# Altium PCB B214.PcbDoc
Units mm, origin at the board's own origin, x right, y up, seen from the top; angles counter-clockwise.
Board outline 40 x 22 mm, 4 copper layers (Top, Layer 1, Layer 2, Bottom), stack 1.564 mm thick; 17 components, 22 nets, 97 pads, 260 vias.
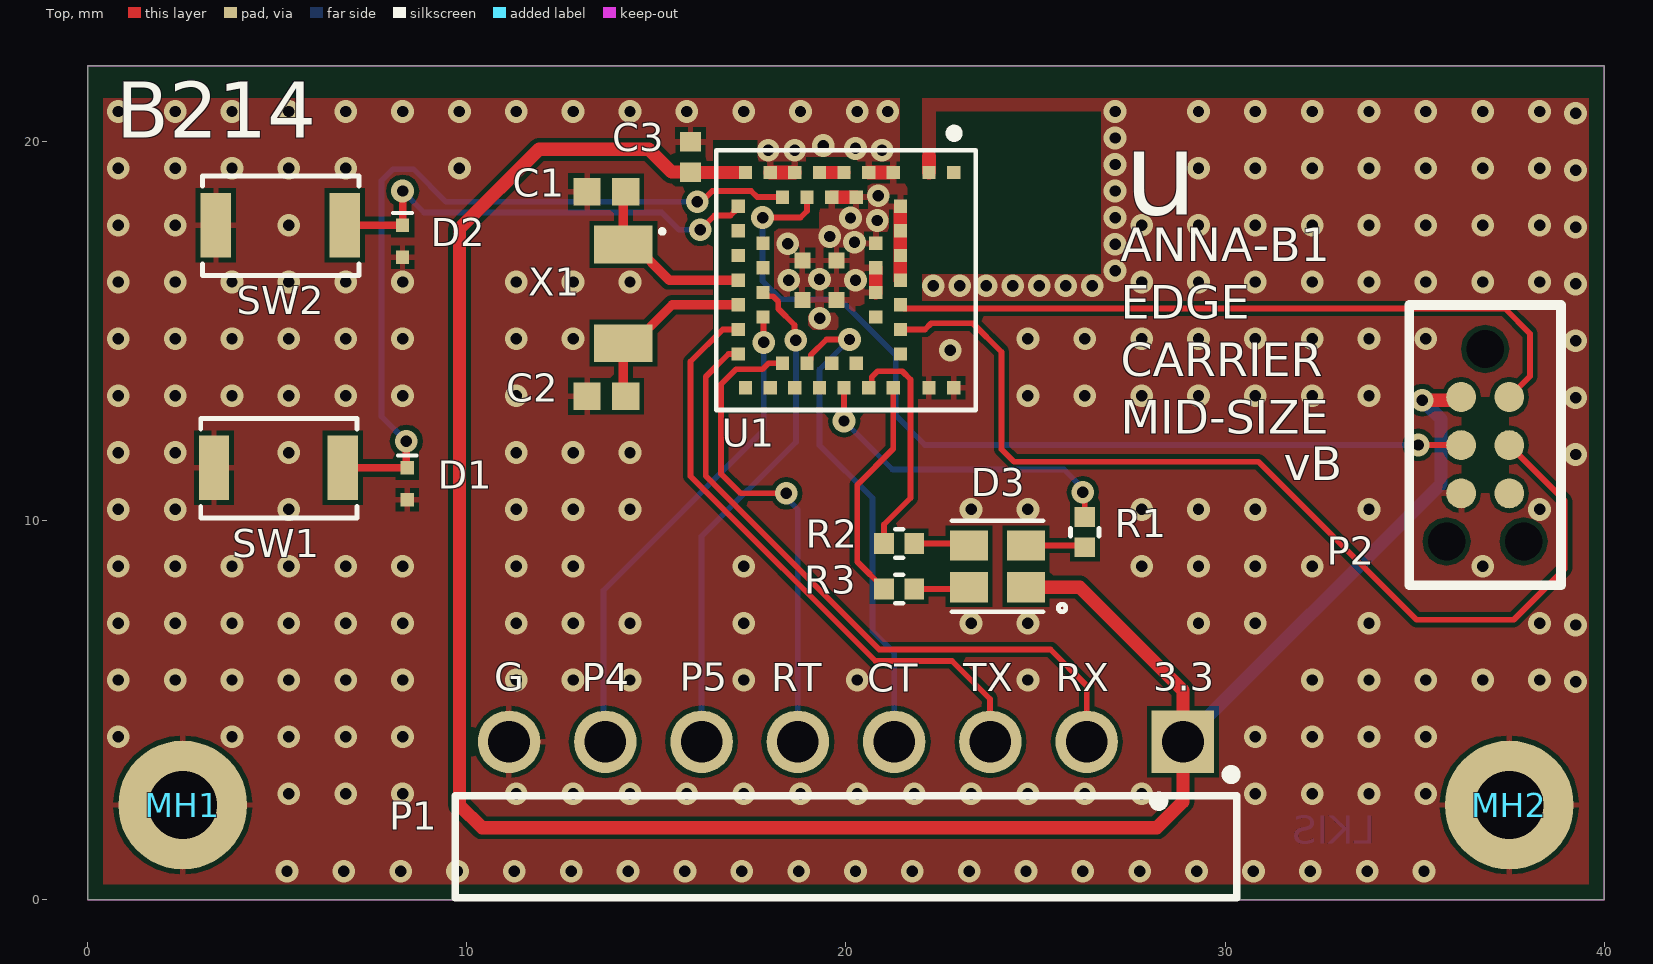
[diagram p0: Top view]
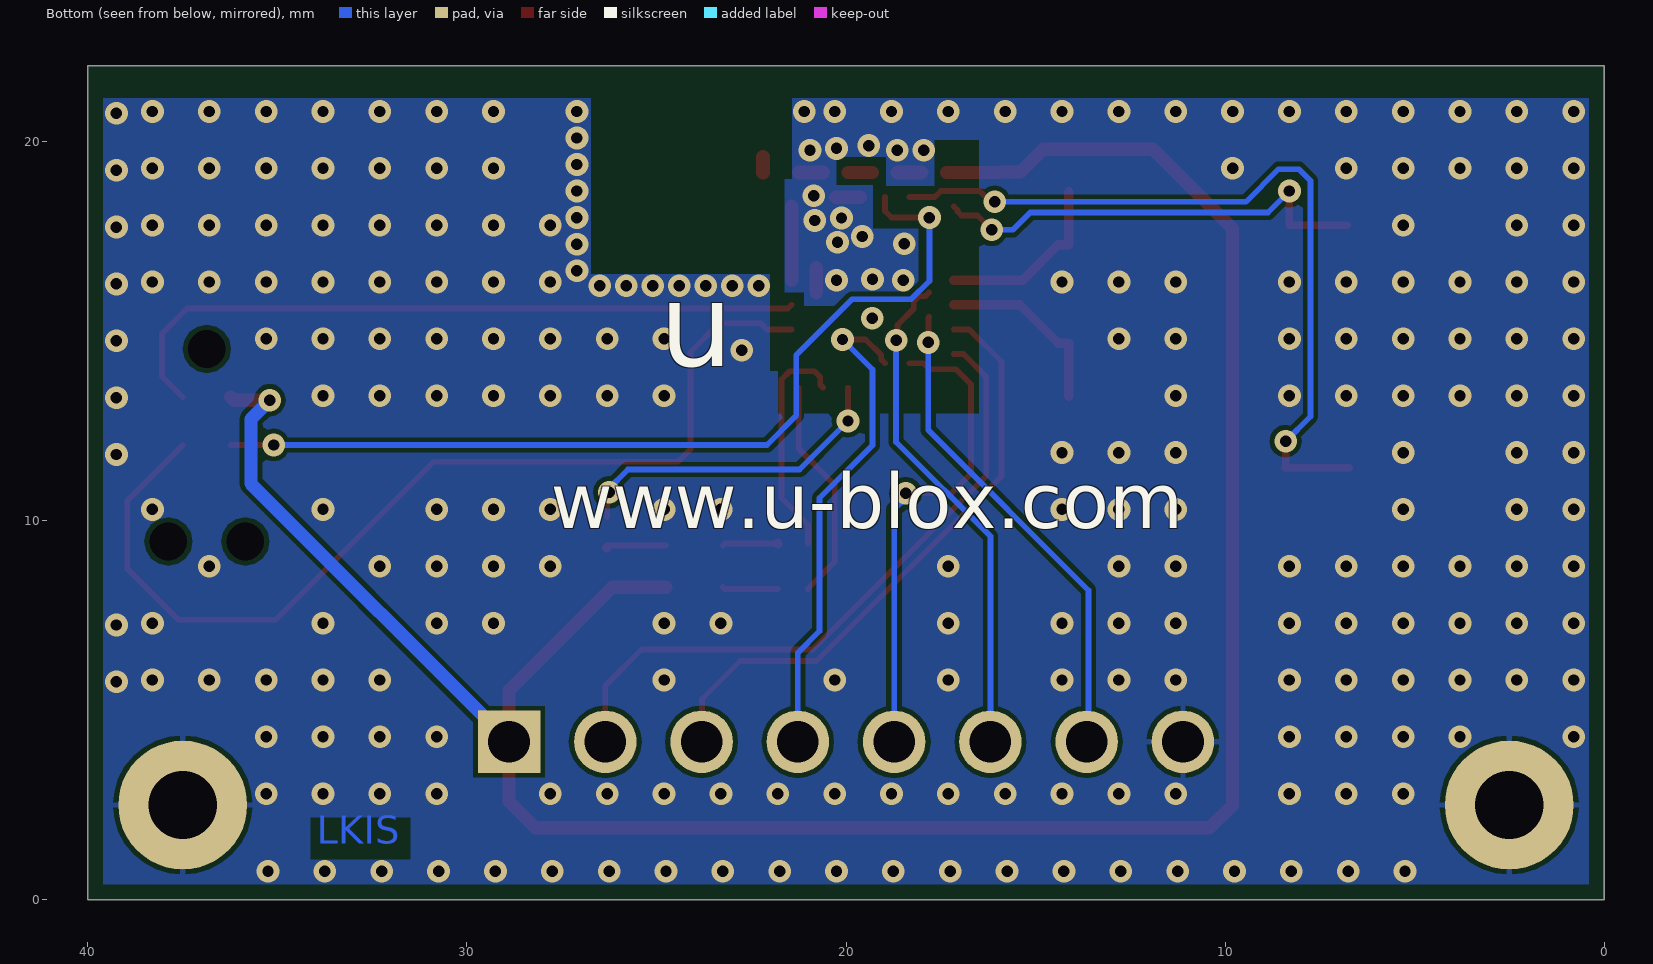
[diagram p1: Bottom view, seen from below]
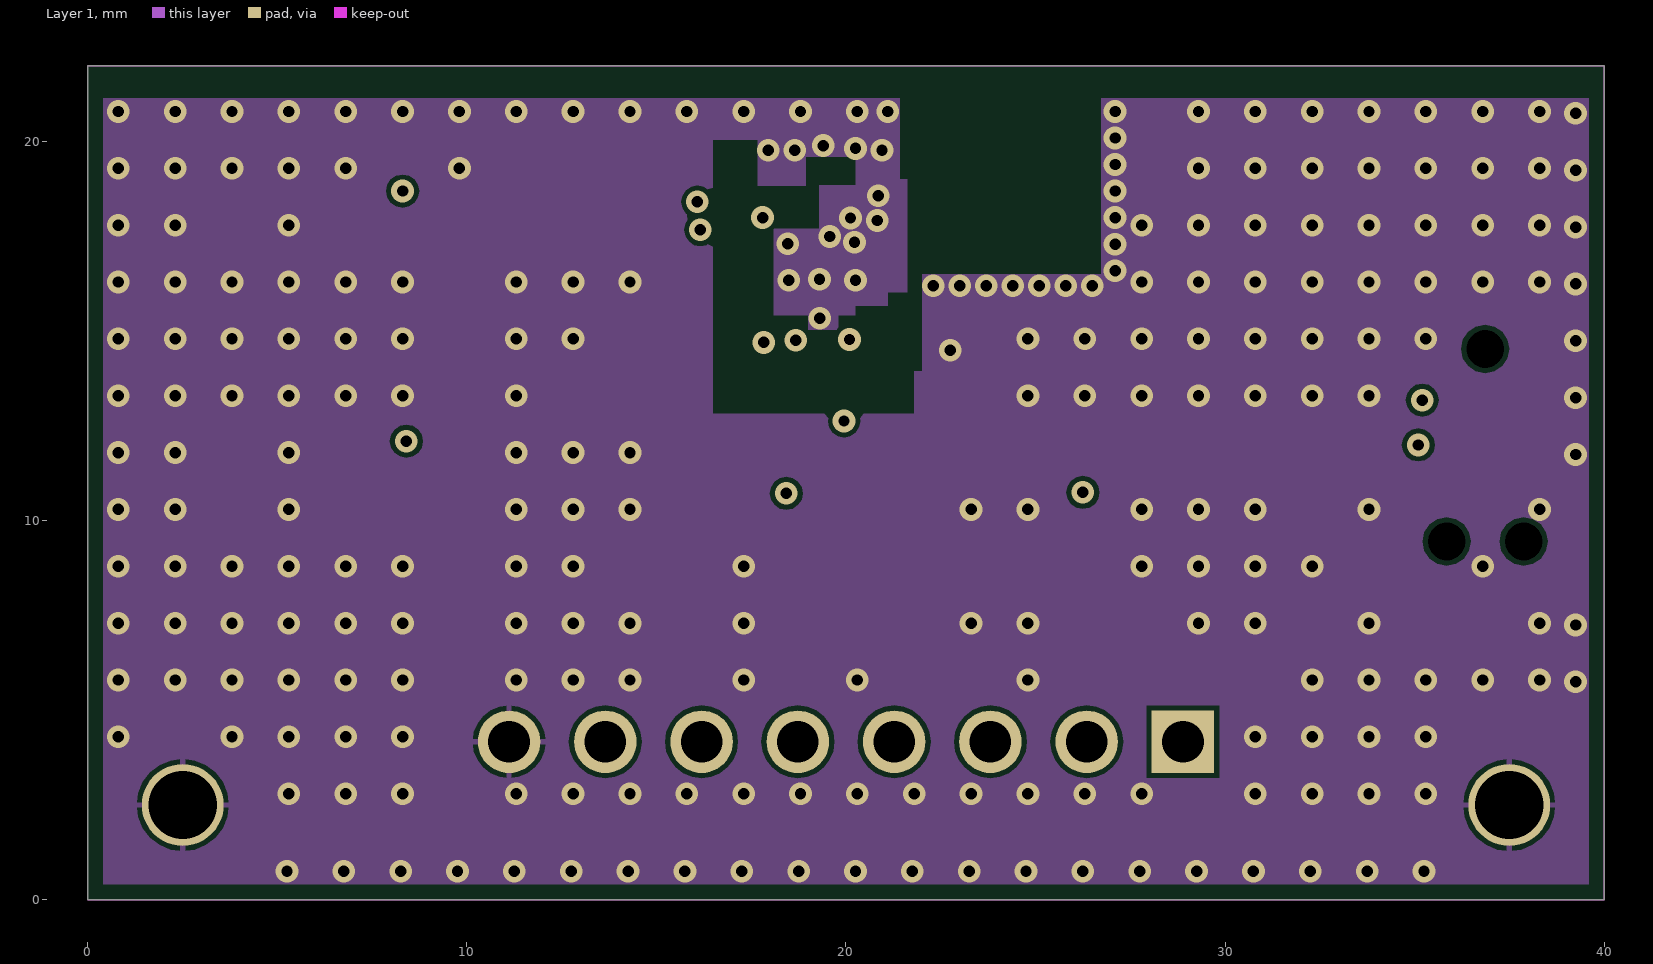
[diagram p2: Layer 1]
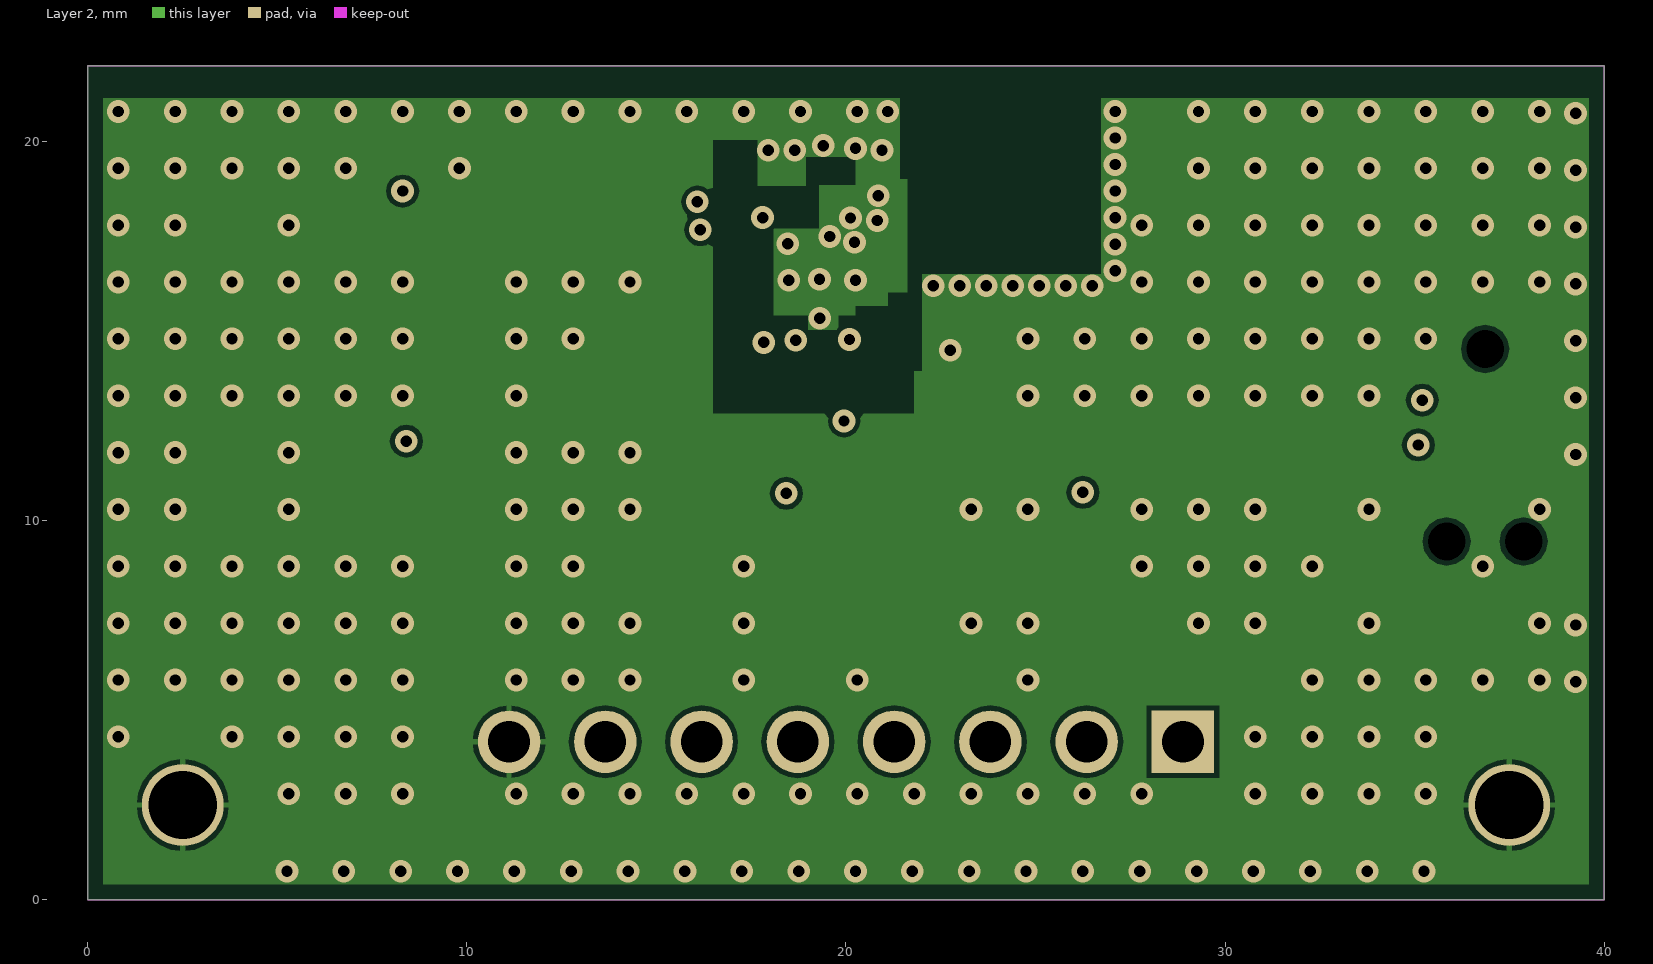
[diagram p3: Layer 2]

## Layer stack, top to bottom
Top Solder: solder mask 0.0203, Solder Resist, Dk 3.5
Top: signal copper 0.0406
Dielectric 1: prepreg 0.0711, PP-006, Dk 4.1
Layer 1: signal copper 0.035
Core: core 1.27, Core-043, Dk 4.3
Layer 2: signal copper 0.035
Dielectric 2: prepreg 0.0711, PP-006, Dk 4.1
Bottom: signal copper 0.0406
Bottom Solder: solder mask 0.0203, Solder Resist, Dk 3.5

## Board outline
0,22 40,22 40,0 0,0

## Design rules (kind name [scope] priority, off if disabled: settings)
BoardOutlineClearance [All] p1: gap=0.4 ignorepadtopadclearanceinfootprint=FALSE
Clearance "Stitching GND" [IsStitchingVia and InNet('GND') vs (IsVia and (Not IsStitchingVia)) Or IsPad] p1: gap=0.127 ignorepadtopadclearanceinfootprint=TRUE
Clearance Clearance_Poly [InPolygon vs OnLayer('Keep-Out Layer') OR (OnLayer('Multi-Layer') AND IsPad  AND Not(PadIsPlated))] p2: gap=0.127 ignorepadtopadclearanceinfootprint=TRUE
Clearance [All] p3: gap=0.127 ignorepadtopadclearanceinfootprint=FALSE except(0: Arc-Text Arc-Hole Track-Text Track-Hole SMDPad-Text SMDPad-Hole THPad-Text THPad-Hole Via-Text Via-Hole Fill-Text Fill-Hole Poly-Text Poly-Hole Region-Text Region-Hole Text-Text Text-Hole)
ComponentClearance [All] p1: gap=0.127 collisioncheckmode=3 verticalgap=0.254 showdistances=FALSE
DiffPairsRouting .14 [All] p1: maxlimit=0.254 minlimit=0.1 mostfreqgap=0.254 toplayer_maxgap=0.1 toplayer_prefgap=0.1 toplayer_minwidth=0.1 toplayer_maxwidth=0.1 toplayer_prefwidth=0.1 midlayer1_mingap=0.254 midlayer1_minwidth=0.381 midlayer1_maxwidth=0.381 midlayer1_prefwidth=0.381 midlayer2_mingap=0.254 midlayer2_minwidth=0.381 midlayer2_maxwidth=0.381 midlayer2_prefwidth=0.381 bottomlayer_maxgap=0.1 bottomlayer_prefgap=0.1 bottomlayer_minwidth=0.1 bottomlayer_maxwidth=0.1 bottomlayer_prefwidth=0.1 maxuncoupledlength=12.7
Height [All] p1: minheight=0 maxheight=25.4 prefheight=2.54
HoleSize [All] p1: absolutevalues=TRUE maxlimit=2540 minlimit=0.127 maxpercent=80.000 minpercent=20.000
HoleToHoleClearance [All] p1: gap=0.152 allowstackedmicrovias=TRUE
MinimumSolderMaskSliver [All] p1: minsoldermaskwidth=0.025
PlaneClearance [InPoly] p1: clearance=0.254
PlaneConnect [All] p1: pad.planeconnectstyle=Relief pad.reliefexpansion=0.508 pad.reliefentries=4 pad.reliefconductorwidth=0.254 pad.reliefairgap=0.254 via.planeconnectstyle=Direct via.reliefexpansion=0.508 via.reliefentries=4 via.reliefconductorwidth=0.254 via.reliefairgap=0.254
PolygonConnect ThermalVias [IsVia] p1: connectstyle=Direct reliefconductorwidth=0.254 reliefentries=4 polygonreliefangle="90 Angle" airgapwidth=0.254
PolygonConnect "PolygonConnect - Power" [InNetClass('')] p2: connectstyle=Relief reliefconductorwidth=0.254 reliefentries=4 polygonreliefangle="90 Angle" airgapwidth=0.127
PolygonConnect PolygonConnect-BGA [InComponentClass('')] p3: connectstyle=Relief reliefconductorwidth=0.152 reliefentries=4 polygonreliefangle="45 Angle" airgapwidth=0.152
PolygonConnect PolygonConnect-General [All] p4: connectstyle=Relief reliefconductorwidth=0.152 reliefentries=4 polygonreliefangle="90 Angle" airgapwidth=0.127
RoutingLayers [All] p1: top layer_v5=TRUE mid layer 1_v5=FALSE mid layer 2_v5=TRUE bottom layer_v5=TRUE
RoutingVias [All] p1: holewidth=0.3 width=0.6 viastyle="Through Hole" minholewidth=0.2 minwidth=0.5 maxholewidth=7 maxwidth=1
SMDEntry [All] p1 off: side=TRUE corner=TRUE anyangle=TRUE
SilkToBoardRegionClearance [All] p1 off:
SilkToSilkClearance [All] p1 off: silktosilkclearance=0.025
SilkToSolderMaskClearance [IsPad] p1 off: minsilkscreentomaskgap=0 clearancetoexposedcopper=TRUE
SolderMaskExpansion SolderMaskExpansion_via [IsVia] p1: expansion=-0.254 istentingtop=TRUE
SolderMaskExpansion [All] p2: expansion=0.05 istentingtop=FALSE
UnRoutedNet [All] p1: checkbadconnections=TRUE
ViasUnderSMD [All] p1: allowed=FALSE
Width [All] p1: maxlimit=2.54 minlimit=0.127 preferedwidth=0.152 toplayer_maxwidth=1 toplayer_prefwidth=0.152 bottomlayer_maxwidth=1 bottomlayer_prefwidth=0.152 minimp=50.000000 maximp=50.000000 favimp=50.000000
Width Width_1 [All] p2: maxlimit=0.254 minlimit=0.254 preferedwidth=0.254
17 further rules are at their usual default settings.

## Components (designator, comment, footprint, x,y, rotation, side; value= is the part's Value field where it differs from the comment)
C1 "Capacitor 10 pF +/- 5% 50 V 0402" CAPC1005X55X25ML05T05 13.675,18.685 r180 top value=10pF
C2 "Capacitor 10 pF +/- 5% 50 V 0402" CAPC1005X55X25ML05T05 13.675,13.285 r180 top value=10pF
C3 "UBXH01-00002434U7" "Cap 0402 HD" 15.9,19.6 r90 top value=4U7
D1 "110-00019" SOD-923 8.425,10.975 r270 top
D2 "110-00019" SOD-923 8.3,17.375 r270 top
D3 "115-00011" 4-PLCC 24,8.8 r0 top
MH1 "MH_M1.5DNP" MH_M1.5 2.5,2.5 r0 top
MH2 "MH_M1.5DNP" MH_M1.5 37.5,2.5 r0 top
P1 "61300811021" 61300811021 20,1.4 r0 top
P2 "TC2030-IDC-NLDNP" TC2030-IDC-NL 36.865,14.535 r270 top
R1 "180-00031499R" "RES 0402 HD" 26.3,9.7 r270 top value=499R
R2 "180-00098220R" "RES 0402 HD" 21.4,9.4 r0 top value=220R
R3 "180-00098220R" "RES 0402 HD" 21.4,8.2 r0 top value=220R
SW1 "135-00007" B3U-1000P 5.025,11.4 r180 top
SW2 "135-00007" B3U-1000P 5.075,17.8 r180 top
U1 "ANNA-B112-OPENCPU" ANNA_LGA52S_650X650 20,16.35 r270 top
X1 "100-00005" XTAL_3215 14.125,15.985 r270 top

## Footprints (in the part's own frame and the unit in brackets; to place one, negate y for a bottom-side part, rotate by r counter-clockwise, add the part's x,y. Pads: shape width x height; smd on the part's side, far side on the other; paste and mask are expansions set on the pad)
4-PLCC [mm] "4 Pin Plastic Leaded Chip Carrier, 2mm x 2mm"
  rect 1x0.8 smd: 1(0.75,-0.55) 2(-0.75,-0.55) 3(-0.75,0.55) 4(0.75,0.55)
  silkscreen extent -1.2,-1.2 1.8,1.2, body extent -1.05,-1.05 1.05,1.05, height 1.01
61300811021 [mm]
  rect 1.65x1.65 hole 1.1: 1(8.89,2.77)
  round 1.65 hole 1.1: 2(6.35,2.77) 3(3.81,2.77) 4(1.27,2.77) 5(-1.27,2.77) 6(-3.81,2.77) 7(-6.35,2.77) 8(-8.89,2.77)
  silkscreen extent -10.31,-1.35 10.31,2.03, body extent -10.16,-7.27 10.16,3.09, height 2.58
ANNA_LGA52S_650X650 [mm]
  rect 0.35x0.35 smd paste+0 mask+0.05: 1(-2.84,2.84) 2(-2.84,2.19) 3(-2.84,1.248) 4(-2.84,0.598) 5(-2.84,-0.052) 6(-2.84,-0.702) 7(-2.84,-1.352) 8(-2.84,-2.002) 9(-2.84,-2.652) 10(-2.19,0.273) 11(-2.19,-0.377) 12(-2.19,-1.027) 13(-2.19,-1.677) 14(-1.95,-2.84) 15(-1.3,-2.84) 17(0,-2.84) 18(0.65,-2.84) 20(1.95,-2.84) 21(-0.975,-2.19) 23(0.325,-2.19) 24(0.975,-2.19) 25(2.84,-2.652) 26(2.84,-2.002) 27(2.84,-1.352) 28(2.84,-0.702) 29(2.84,-0.052) 30(2.84,0.598) 31(2.84,1.248) 32(2.84,2.19) 33(2.84,2.84) 34(2.19,-1.677) 35(2.19,-1.027) 36(2.19,-0.377) 37(2.19,0.273) 38(1.95,1.435) 39(1.3,1.435) 40(0.65,1.435) 41(0,1.435) 42(-0.65,1.435) 43(-1.3,1.435) 44(-1.95,1.435) 46(0.325,0.785) 48(-0.975,0.785)
  rect 0.35x0.35 smd mask+0.05: 16(-0.65,-2.84) 19(1.3,-2.84) 22(-0.325,-2.19) 45(0.975,0.785) 47(-0.325,0.785)
  rect 0.42x0.42 smd paste+0 mask+0.05: 49(-0.52,-0.252) 50(-0.52,-1.152) 51(0.52,-1.152) 52(0.52,-0.252)
  silkscreen extent -3.97,-3.42 3.42,3.43, body extent -3.25,-3.25 3.25,3.25, height 1.2
B3U-1000P [mm] "Button Tactile, SMT 4mm x 2.5mm, height 1.2mm"
  rect 0.8x1.7 smd: 1(-1.7,0) 2(1.7,0)
  silkscreen extent -2.07,-1.3 2.05,1.33, body extent -2,-1.25 2,1.25, height 1.6
"Cap 0402 HD" [mm] "Chip Capacitor, 2-Leads, Body 1.00x0.50mm, IPC High Density"
  rect 0.52x0.55 smd: 1(-0.4,0) 2(0.4,0)
  body extent -0.55,-0.3 0.55,0.3, height 0.6
CAPC1005X55X25ML05T05 [mm] "Chip Capacitor, 2-Leads, Body 1.05x0.55mm, IPC Low Density"
  rect 0.72x0.72 smd: 1(-0.51,0) 2(0.51,0)
  body extent -0.53,-0.28 0.53,0.28, height 0.55
MH_M1.5 [mm] "Mounting Hole M1.5 Metric, 3.4mm diameter pad"
  round 3.4 / inner round 2.159 / far side round 3.4 hole 1.8: 1(0,0)
"RES 0402 HD" [mm] "Chip Resistor, 2-Leads, Body 1.05x0.54mm, IPC High Density"
  rect 0.52x0.55 smd: 1(-0.4,0) 2(0.4,0)
  silkscreen extent -0.1,-0.38 0.1,0.38, body extent -0.55,-0.3 0.55,0.3, height 0.4
SOD-923 [mm] "SOD-923, 2-Leads, Body 1.25x2.50mm, IPC High Density,"
  rect 0.36x0.35 smd mask+0.05: 1(-0.42,0) 2(0.42,0)
  silkscreen extent -0.75,-0.25 -0.75,0.25, body extent -0.4,-0.3 0.4,0.3, height 0.4
TC2030-IDC-NL [mm] "Tag-Connect 6-Pin No Legs"
  round 0.9 hole 0.995 unplated: 0(0,0) 0(5.08,-1.016) 0(5.08,1.016)
  round 0.79 smd paste-0.39: 1(1.27,-0.635) 2(1.27,0.635) 3(2.54,-0.635) 4(2.54,0.635) 5(3.81,-0.635) 6(3.81,0.635)
  silkscreen extent -1.16,-2 6.24,2
XTAL_3215 [mm] "XTAL, 2-Leads, Body 1.50x3.20mm"
  rect 1x1.55 smd: 1(-1.3,0) 2(1.3,0)
  silkscreen extent -1.7,0.98 -1.6,1.07, body extent -1.65,-0.8 1.65,0.8, height 0.9

## Part data
C1 C2: library part CMP-001-00013-4, "Chip Capacitor, 10 pF, +/- 5%, 50 V, 0402 (1005 Metric)", Capacitor Type=Ceramic, Case/Package=0402, Max Operating Temperature=125°C, Min Operating Temperature=-55°C, Tolerance=5%, Voltage Rating=50V, Mounting Technology=SM, Pins=2, RoHS Compliant=True
C3: library part UBXH01-0000243, "CAP CER X5R 0402", Manufacturer="Murata Manufacturing Company, Ltd.", Manufacturer 2=None, Manufacturer P/N=GRM155R61A475MEAA, Max Operating Temp=85°C, Max Voltage=10.0V, Min Operating Temp=-40°C, Tolerance=20%, Automotive=None, Critical=None, Editor=dario.antonaz, Env=ROHS, Manufacturer 3=None, Manufacturer P/N 2=None, Manufacturer P/N 3=None, Max Current=None, Max Power=None, Mfg P/N Datasheet=https://wiki.u-blox.com/bin/view/Generic/Docs/DocumentSummary?index=24302, Mfg P/N Datasheet 2=None, Mfg P/N Datasheet 3=None, Mfg P/N Released=Yes, Mfg P/N Released 2=None, Mfg P/N Released 3=None, Mfg P/N Split=100, Mfg P/N Split 2=None, Mfg P/N Split 3=None, Mfg P/N Status=Active, Mfg P/N Status 2=None, Mfg P/N Status 3=None, Part Number=UBXH01-0000243, Part Type=Capacitor, Perferred=PREF, Permitted Use="Volume Products", RefDes=C, Release Data="2016-03-17 10:02:21.014314", Released by=pasquale.scorca, Single Source=None, Size=0x0y, UBX Wiki=https://wiki.u-blox.com/bin/view/Operations/PartDetails?index=24303
D1 D2: "Diode, ESD9B, 3.3V, ST5G, SOD-923", Manufacturer="ON Semiconductor", Manufacturer P/N=ESD9B3.3ST5G, MFG Package=SOD-923, Package Type=SOD, Part Name="Diode TVS 3.3V SOD-923", Voltage=3.3V, Arena Link=https://app.bom.com/a/4M5DJQ9Q9SR7DV4H?v=spec.summary, Body Size="0.8mm x 0.6mm", Component Mounting Type=SMT, Diode Type=TVS, Height=0.4mm, Item_Phase=Production, Part Number=110-00019, Part_Type=Diode, Pins=2, Revision=0A, Supplier 1=Arrow, Supplier Part Number 1=ESD9B3.3ST5G, Use in new designs=Yes
D3: "LED, RGB Diffused SMT, PLCC4 4 Pin", Color=RGB, Current="20mA Red, 10mA Green, 10mA, Blue", Manufacturer="Cree, Inc.", Manufacturer P/N=CLMVB-FKA-CFHEHLCBB7a363, MFG Package=PLCC4, Package Type=Custom, Part Name="LED RGB SMT 2mm x 2mm", Supplier Part Number 1=941-CLMVBFKACFHEHLCB, Voltage=5V, Arena Link=https://app.bom.com/a/UCV39GZGZIHY581D?v=spec.summary, Body Size="2.0mm x 2.0mm", Component Mounting Type=SMT, Height=1mm, Item_Phase=Production, Mounting Type=Vertical, Number of Circuits=3, Part Number=115-00011, Part_Type=LED, Pins=4, Revision=0A, Supplier 1=Mouser, Use in new designs=Yes, Vf="2V Red, 3V Green, 3V Blue"
MH1 MH2: library part MH_M1.5, "1.5M screw mounting hole, plated", Added By="Jeremy D", Added Date=2015-07-09, DNP=DNP, Height=0mm, Part Number=MH_M1.5, Size="3.4mm x 3.4mm", Type="Mounting Hole"
P1: library part CMP-1502-01075-1, "THT Angled Pin Header WR-PHD, Pitch 2.54 mm, Single Row, 8 pins", Contact Resistance=20mOhm, Manufacturer="Wurth Elektronik", Operating Temperature=-40to105degC, Rated Current=3A, Withstanding Voltage=500VAC, Working Voltage=250VAC, Datasheet URL=https://katalog.we-online.de/em/datasheet/6130xx11021.pdf, Gender=Male, Manufacturer Part Number=61300811021, Manufacturer URL=http://www.we-online.de, Mounting Technology=THT, Orientation=Angled, Package Reference=61300811021, Packaging=Bag, Part Number=61300811021, Pin Number=8, Pitch=2.54mm, Publisher=WurthElektronik, Row Number=Single
P2: library part TC2030-IDC-NL, "CON PADS FOR CBL PLUG-OF-NAILS 6-PIN NO LEGS", Manufacturer="TAG Connect", Added By="Paul B", Added Date=2015-04-22, DNP=DNP, Height=0, Manufacturer P/N=TC2030-IDC-NL, Part Number=TC2030-IDC-NL, Size="6.731mm x 12.446mm"
R1: library part 180-00031, "Resistor, 499ohm, 1%, 1/16W, 0402", Manufacturer="Rohm Semiconductor", Manufacturer 2="Samsung Electro-Mechanics America, Inc", Manufacturer P/N=MCR01MRTF4990, Manufacturer P/N 2=RC1005F4990CS, Part Name="RES SMD 499 OHM 1% 1/16W 0402", Power=1/16W, Supplier Part Number 1=RHM499CDCT-ND, Tolerance="+/- 1%", Alternate Footprint Ref="RES 0402", Arena Link=https://app.bom.com/a/Q8RZ5CVCVEDU1SS5?v=spec.summary, Component Mounting Type=SMT, Height=0.4mm, Item_Phase=Production, Part Number=180-00031, Part_Type=Resistor, Pins=2, Revision=0D, Size=0402, Supplier 1=Digi-Key, Supplier 2=Digi-Key, Supplier Part Number 2=1276-3992-1-ND, Use in new designs=Yes
R2 R3: library part 180-00098, "Resistor, 220ohm, 5%, 1/16W, 0402.", Manufacturer="Panasonic Electronic Components", Manufacturer 2="Samsung Electro-Mechanics America, Inc", Manufacturer P/N=ERJ-2GEJ221X, Manufacturer P/N 2=RC1005J221CS, Part Name="RES SMD 220 OHM 5% 1/16W 0402", Power=1/16W, Supplier Part Number 1=P220JCT-ND, Tolerance="+/- 5%", Alternate Footprint Ref="RES 0402", Arena Link=https://app.bom.com/a/8Q9HNUDUDWVBJC30?v=spec.summary, Component Mounting Type=SMT, Height=0.4mm, Item_Phase=Production, Part Number=180-00098, Part_Type=Resistor, Pins=2, Revision=0C, Size=0402, Supplier 1=Digi-Key, Supplier 2=Digi-Key, Supplier Part Number 2=1276-4360-1-ND, Use in new designs=Yes
SW1 SW2: "Button, Momentary SPST-NO, 0.05A, 12V, 3mm x 2.5mm", Current=50mA, Manufacturer="Omron Electronics Inc-EMC Div", Manufacturer P/N=B3U-1000P, Part Name="SWITCH TACTILE SPST-NO 0.05A 12V", Supplier Part Number 1=SW1020CT-ND, Voltage=12VDC, Arena Link=https://app.bom.com/a/TBU28FYFYHGV5FQ0?v=spec.summary, Body Size="3mm x 2.5mm", Component Mounting Type=SMT, Height=1.2mm, Item_Phase=Production, Part Number=135-00007, Part_Type=Button, Pins=2, Revision=0A, Supplier 1=Digi-Key, Switch/Button Circuit=SPST, Switch/Button Function=Off-Mom, Use in new designs=Yes
U1: "u-blox ANNA-B112 Bluetooth 5 LE module", Manufacturer=u-blox, Part Description="Stand-alone Bluetooth low energy module"
X1: "XTAL, 2Pin, 32.768kHz, 7pF 20ppm", Frequency=32.768kHz, Frequency Tolerance=20ppm, Manufacturer=Epson, Manufacturer 2="AVX Corporation", Manufacturer P/N="FC-135 32.7680KA-AG3", Manufacturer P/N 2=ST3215SB32768C0HPWBB, MFG Package=2-SMD, Part Name="XTAL 32.768kHz 7pF 20ppm 3215", Supplier Part Number 1=SER4086CT-ND, Arena Link=https://app.bom.com/a/L3MU07Q7Q98O5PC8?v=spec.summary, Body Size="3.2mm x 1.5mm", CL=7pF, Component Mounting Type=SMT, Height=0.9mm, Item_Phase=Production, Part Number=100-00005, Part_Type=Crystal/Oscillator, Pins=2, Revision=0C, Supplier 1=Digi-Key, Supplier 2=Digi-Key, Supplier Part Number 2=1253-1113-1-ND, Use in new designs=Yes

## Via types
v1: diameter 0.6, hole 0.3, Top to Bottom, tented both sides, 260 vias

## Nets (pads, with @x,y where several pads share a name; then routed paths per layer and width w, separated by ;. In a path a pad name is that pad's centre, name@x,y a point inside that pad or via, vN(x,y) a via of type N, cw(c..) or ccw(c..) an arc to the next point about the centre after c; other vN are vias at no path point)
3V3: C3.1 D3.1 P1.1 P2.1 U1.9 | length 64.8
  Top w0.35: U1.9 15.91,19.19 C3.1 15.4,19.2 14.8,19.8 11.9,19.8 9.8,17.7 9.8,2.5 10.4,1.9 28.2,1.9 28.89,2.59 P1.1 28.89,5.527 26.167,8.25 D3.1 ; v1(35.204,13.183) 36.148,13.183 P2.1
  Bottom w0.35: P1.1 35.702,10.982 35.702,12.685 v1(35.204,13.183)
ANT_INT_EDGE: U1.5 U1.6 | length 0.6
  Top w0.35: U1.6 U1.5
BLUE: R3.1 U1.31 | length 6
  Top w0.152: R3.1 21,8.215 20.295,8.92 20.295,10.947 21.248,11.901 U1.31
BUTTON1: D1.1 SW1.1 U1.13 | length 20.8
  Top w0.152: v1(16.078,18.415) 16.182,18.415 16.47,18.703 17.497,18.703 17.66,18.54 U1.13
  Top w0.2: SW1.1 6.73,11.395 D1.1 8.4,11.42 v1(8.4,12.1)
  Bottom w0.152: v1(8.4,12.1) 7.747,12.753 7.747,18.974 8.052,19.279 8.585,19.279 9.449,18.415 v1(16.078,18.415)
BUTTON2: D2.1 SW2.1 U1.14 | length 12
  Top w0.152: SW2.1 SW2.1@6.78,17.795 ; D2.1@8.295,17.795 8.3,17.8 D2.1 ; v1(16.154,17.678) 16.529,18.053 16.953,18.053 17.061,18.161 17.061,18.201 U1.14
  Top w0.2: SW2.1@6.78,17.795 D2.1@8.295,17.795 ; D2.1 v1(8.3,18.7)
  Bottom w0.152: v1(8.3,18.7) 8.864,18.136 15.138,18.136 15.596,17.678 v1(16.154,17.678)
CLK1: C1.1 U1.17 X1.1 | length 4.8
  Top w0.254: C1.1@14.125,18.685 X1.1 14.4,17.285 15.335,16.35 U1.17
CLK2: C2.1 U1.18 X1.2 | length 4.9
  Top w0.254: C2.1@14.125,13.285 X1.2 14.4,14.685 15.415,15.7 U1.18
CTS: P1.4 U1.35 | length 13.2
  Top w0.152: U1.35 19.072,14.259 19.072,14.372 19.483,14.783 v1(20.091,14.783)
  Bottom w0.152: v1(20.091,14.783) 19.304,13.995 19.304,11.996 20.7,10.6 20.7,7.089 21.27,6.519 P1.4
GND: C1.2 C2.2 C3.2 D1.2 D2.2 MH1.1 MH2.1 P1.8 P2.5 SW1.2 SW2.2 U1.2 U1.3 U1.4 U1.7 U1.8 U1.10 U1.11 U1.32 U1.33 U1.41 U1.42 U1.43 U1.44 U1.46 U1.47 U1.48 U1.49 U1.50 U1.51 U1.52 | length 5
  Top w0.36: U1.8 U1.7 ; U1.11 U1.10 ; U1.4 U1.3 ; U1.46 U1.47 ; U1.41 U1.42 U1.43 U1.44 ; U1.2 22.19,19.6
  other v1: 5.25,0.75 6.75,0.75 8.25,0.75 9.75,0.75 11.25,0.75 12.75,0.75 14.25,0.75 15.75,0.75 17.25,0.75 18.75,0.75 20.25,0.75 21.75,0.75 23.25,0.75 24.75,0.75 26.25,0.75 27.75,0.75 29.25,0.75 30.75,0.75 32.25,0.75 33.75,0.75 35.25,0.75 5.3,2.8 6.8,2.8 8.3,2.8 11.3,2.8 12.8,2.8 14.3,2.8 15.8,2.8 17.3,2.8 18.8,2.8 20.3,2.8 21.8,2.8 23.3,2.8 24.8,2.8 26.3,2.8 27.8,2.8 30.8,2.8 32.3,2.8 33.8,2.8 35.3,2.8 0.8,4.3 3.8,4.3 5.3,4.3 6.8,4.3 8.3,4.3 30.8,4.3 32.3,4.3 33.8,4.3 35.3,4.3 39.25,5.75 0.8,5.8 2.3,5.8 3.8,5.8 5.3,5.8 6.8,5.8 8.3,5.8 11.3,5.8 12.8,5.8 14.3,5.8 17.3,5.8 20.3,5.8 24.8,5.8 32.3,5.8 33.8,5.8 35.3,5.8 36.8,5.8 38.3,5.8 39.25,7.25 0.8,7.3 2.3,7.3 3.8,7.3 5.3,7.3 6.8,7.3 8.3,7.3 11.3,7.3 12.8,7.3 14.3,7.3 17.3,7.3 23.3,7.3 24.8,7.3 29.3,7.3 30.8,7.3 33.8,7.3 38.3,7.3 0.8,8.8 2.3,8.8 3.8,8.8 5.3,8.8 6.8,8.8 8.3,8.8 11.3,8.8 12.8,8.8 17.3,8.8 27.8,8.8 29.3,8.8 30.8,8.8 32.3,8.8 36.8,8.8 0.8,10.3 2.3,10.3 5.3,10.3 11.3,10.3 12.8,10.3 14.3,10.3 23.3,10.3 24.8,10.3 27.8,10.3 29.3,10.3 30.8,10.3 33.8,10.3 38.3,10.3 39.25,11.75 0.8,11.8 2.3,11.8 5.3,11.8 11.3,11.8 12.8,11.8 14.3,11.8 39.25,13.25 0.8,13.3 2.3,13.3 3.8,13.3 5.3,13.3 6.8,13.3 8.3,13.3 11.3,13.3 24.8,13.3 26.3,13.3 27.8,13.3 29.3,13.3 30.8,13.3 32.3,13.3 33.8,13.3 22.75,14.5 39.25,14.75 0.8,14.8 2.3,14.8 3.8,14.8 5.3,14.8 6.8,14.8 8.3,14.8 11.3,14.8 12.8,14.8 24.8,14.8 26.3,14.8 27.8,14.8 29.3,14.8 30.8,14.8 32.3,14.8 33.8,14.8 35.3,14.8 19.304,15.342 22.3,16.2 23,16.2 23.7,16.2 24.4,16.2 25.1,16.2 25.8,16.2 26.5,16.2 39.25,16.25 0.8,16.3 2.3,16.3 3.8,16.3 5.3,16.3 6.8,16.3 8.3,16.3 11.3,16.3 12.8,16.3 14.3,16.3 27.8,16.3 29.3,16.3 30.8,16.3 32.3,16.3 33.8,16.3 35.3,16.3 36.8,16.3 38.3,16.3 18.49,16.35 20.25,16.35 19.3,16.37 27.1,16.6 18.46,17.31 27.1,17.3 20.225,17.35 19.57,17.5 39.25,17.75 0.8,17.8 2.3,17.8 5.3,17.8 27.8,17.8 29.3,17.8 30.8,17.8 32.3,17.8 33.8,17.8 35.3,17.8 36.8,17.8 38.3,17.8 20.825,17.925 20.12,17.99 27.1,18 20.85,18.575 27.1,18.7 39.25,19.25 0.8,19.3 2.3,19.3 3.8,19.3 5.3,19.3 6.8,19.3 9.8,19.3 29.3,19.3 30.8,19.3 32.3,19.3 33.8,19.3 35.3,19.3 36.8,19.3 38.3,19.3 27.1,19.4 17.95,19.775 18.65,19.775 20.95,19.775 20.25,19.825 19.4,19.9 27.1,20.1 39.25,20.75 0.8,20.8 2.3,20.8 3.8,20.8 5.3,20.8 6.8,20.8 8.3,20.8 9.8,20.8 11.3,20.8 12.8,20.8 14.3,20.8 15.8,20.8 17.3,20.8 18.8,20.8 20.3,20.8 21.1,20.8 27.1,20.8 29.3,20.8 30.8,20.8 32.3,20.8 33.8,20.8 35.3,20.8 36.8,20.8 38.3,20.8
GREEN: R2.1 U1.30 | length 6.1
  Top w0.152: U1.30 20.68,13.592 20.68,13.797 20.828,13.945 21.486,13.945 21.7,13.73 21.7,10.6 21,9.9 R2.1
NetD3_2: D3.2 R3.2 | length 1.5
  Top w0.152: R3.2 23.2,8.2 D3.2
NetD3_3: D3.3 R2.2 | length 1.5
  Top w0.152: R2.2 23.2,9.4 D3.3
NetD3_4: D3.4 R1.2 | length 1.6
  Top w0.152: D3.4 26.25,9.35 R1.2
  Top w0.254: R1.2 R1.2@26.313,9.287
nRESET: P2.3 U1.12 | length 24.4
  Top w0.152: v1(17.8,18) 18.8,18 18.973,18.173 U1.12 ; v1(35.1,12) 35.103,11.997 36.228,11.997 P2.3
  Bottom w0.152: v1(17.8,18) 17.8,16.329 18.284,15.845 19.842,15.845 21.311,14.376 21.311,12.776 22.087,12 v1(35.1,12)
P0.04: P1.7 U1.24 | length 13
  Top w0.152: U1.24 17.82,15.365 17.82,14.717 v1(17.831,14.707)
  Bottom w0.152: P1.7 13.6,4.22 13.6,8.164 17.831,12.395 v1(17.831,14.707)
P0.05: P1.6 U1.23 | length 13.3
  Top w0.152: U1.23 17.909,15.926 18.074,15.926 18.213,15.787 18.213,15.594 18.64,15.167 18.64,14.799 v1(18.677,14.762)
  Bottom w0.152: P1.6 16.19,9.59 18.677,12.077 v1(18.677,14.762)
RED: R1.1 U1.29 | length 8.7
  Top w0.152: v1(19.948,12.633) U1.29 ; v1@26.289,10.82 26.3,10.809 R1.1
  Bottom w0.152: v1(19.948,12.633) 21.227,11.354 25.756,11.354 v1@26.289,10.82
  other v1: 26.25,10.75
RTS: P1.5 U1.34 | length 12.8
  Top w0.152: U1.34 17.96,14.16 17.8,14 17.452,14 17.448,13.997 17.097,13.997 16.7,13.6 16.7,11.24 17.215,10.725 v1(18.425,10.725)
  Bottom w0.152: v1(18.425,10.725) 18.425,10.604 18.73,10.299 P1.5
RXD: P1.2 U1.20 | length 17.5
  Top w0.152: U1.20 16.9,14.4 16.3,13.8 16.3,11.183 20.879,6.604 25.396,6.604 26.35,5.65 P1.2
SWCLK: P2.4 U1.39 | length 26.8
  Top w0.152: U1.39 22.086,15.05 22.25,15.215 23.343,15.215 24.105,14.453 24.105,11.887 24.435,11.557 30.886,11.557 35.052,7.391 37.617,7.391 38.964,8.738 38.964,10.531 P2.4
SWDIO: P2.2 U1.40 | length 18.8
  Top w0.152: U1.40 21.534,15.601 21.622,15.601 21.623,15.6 37.384,15.6 38.049,14.935 38.049,13.814 P2.2
TXD: P1.3 U1.19 | length 16.1
  Top w0.152: U1.19 16.75,15.05 15.9,14.2 15.9,11.176 20.776,6.3 22.8,6.3 23.8,5.3 23.8,4.18 P1.3
pads on no net: P2.0 P2.6 U1.1 U1.15 U1.16 U1.21 U1.22 U1.25 U1.26 U1.27 U1.28 U1.36 U1.37 U1.38 U1.45

## Polygon pours and split planes (outlines as drawn)
GND on Top "GND_L01_P021" (solid, remove dead copper, pour order 21): 0,21.15 40,21.15 40,0 0,0
GND on Top "GND_L01_P020" (solid, pour order 20): 22.37,19.52 22.01,19.52 22.01,21.15 26.73,21.15 26.73,20.8 22.37,20.8
GND on Bottom "GND_L04_P022" (solid, remove dead copper, pour order 22): 0,21.15 40,21.15 40,0 0,0
GND on Layer 1 "GND_L02_P023" (solid, remove dead copper, pour order 23): 0,21.15 40,21.15 40,0 0,0
GND on Layer 2 "GND_L03_P024" (solid, remove dead copper, pour order 24): 0,21.15 40,21.15 40,0 0,0

## Keep-outs
Keep-Out Layer:
  the board outline again, w0.025

## Other copper
Top:
  pour cut-out: 26.73,16.5 22.01,16.5 22.01,13.95 21.8,13.95 21.8,12.83 16.48,12.83 16.48,20.05 17.67,20.05 17.67,18.84 18.94,18.84 18.94,19.6 20.26,19.6 20.26,18.86 19.3,18.86 19.3,17.7 18.1,17.7 18.1,15.42 19,15.42 19,15.04 19.8,15.04 19.8,15.42 20.24,15.42 20.24,15.67 21.1,15.67 21.1,16.03 21.61,16.03 21.61,19.01 21.42,19.01 21.42,21.15 22.01,21.15 22.01,19.01 22.37,19.01 22.37,20.8 26.73,20.8
  pour cut-out: 36.6,13.275 37.125,13.275 37.5,12.9 37.5,11.075 37.15,10.725 36.575,10.725 36.23,11.07 36.23,12.905 36.3,12.975
Layer 1:
  pour cut-out: 26.73,16.5 22.01,16.5 22.01,13.95 21.8,13.95 21.8,12.83 16.48,12.83 16.48,20.05 17.67,20.05 17.67,18.84 18.94,18.84 18.94,19.6 20.26,19.6 20.26,18.86 19.3,18.86 19.3,17.7 18.1,17.7 18.1,15.42 19,15.42 19,15.04 19.8,15.04 19.8,15.42 20.24,15.42 20.24,15.67 21.1,15.67 21.1,16.03 21.61,16.03 21.61,19.01 21.42,19.01 21.42,21.15 22.37,21.15 26.73,21.15
Layer 2:
  pour cut-out: 26.73,16.5 22.01,16.5 22.01,13.95 21.8,13.95 21.8,12.83 16.48,12.83 16.48,20.05 17.67,20.05 17.67,18.84 18.94,18.84 18.94,19.6 20.26,19.6 20.26,18.86 19.3,18.86 19.3,17.7 18.1,17.7 18.1,15.42 19,15.42 19,15.04 19.8,15.04 19.8,15.42 20.24,15.42 20.24,15.67 21.1,15.67 21.1,16.03 21.61,16.03 21.61,19.01 21.42,19.01 21.42,21.15 22.37,21.15 26.73,21.15
Bottom:
  pour cut-out: 31.496,1.067 31.496,2.168 34.121,2.168 34.121,1.067
  pour cut-out: 26.73,16.5 22.01,16.5 22.01,13.95 21.8,13.95 21.8,12.83 16.48,12.83 16.48,20.05 17.67,20.05 17.67,18.84 18.94,18.84 18.94,19.6 20.26,19.6 20.26,18.86 19.3,18.86 19.3,17.7 18.1,17.7 18.1,15.42 19,15.42 19,15.04 19.8,15.04 19.8,15.42 20.24,15.42 20.24,15.67 21.1,15.67 21.1,16.03 21.61,16.03 21.61,19.01 21.42,19.01 21.42,21.15 22.37,21.15 26.73,21.15
  text "LKIS" at 33.966,1.231 h1.27

## Silkscreen, mask and mechanical layers (free items; w line width, h text height)
Top Overlay:
  circle w0.254: c28.25,2.6 r0.127
  text "B214" at 0.75,19.62 h2.54
  text "u" at 27.339,17.354 h3.81
  text "ANNA-B1 / EDGE / CARRIER / MID-SIZE" at 27.25,12 h1.52
  text "vB" at 31.55,10.775 h1.52
  text "G" at 10.724,5.263 h1.27
  text "P5" at 15.618,5.263 h1.27
  text "3.3" at 28.111,5.265 h1.27
  text "P4" at 13.022,5.25 h1.27
  text "RT" at 18.025,5.25 h1.27
  text "CT" at 20.559,5.238 h1.27
  text "TX" at 23.092,5.25 h1.27
  text "RX" at 25.535,5.25 h1.27
Bottom Overlay:
  text "u" at 24.911,13.348 h3.81
  text "www.u-blox.com" at 27.796,9.31 h2.5
Route Tool Path:
  the board outline again, w0.127